# Altium PCB XL992FXT10W.PcbDoc (part 1 of 2)
Units mm, origin at the board's own origin, x right, y up, seen from the top; angles counter-clockwise.
Board outline 35.2 x 48.31 mm, 2 copper layers (Top Layer, Bottom Layer); 89 components, 57 nets, 280 pads, 137 vias.
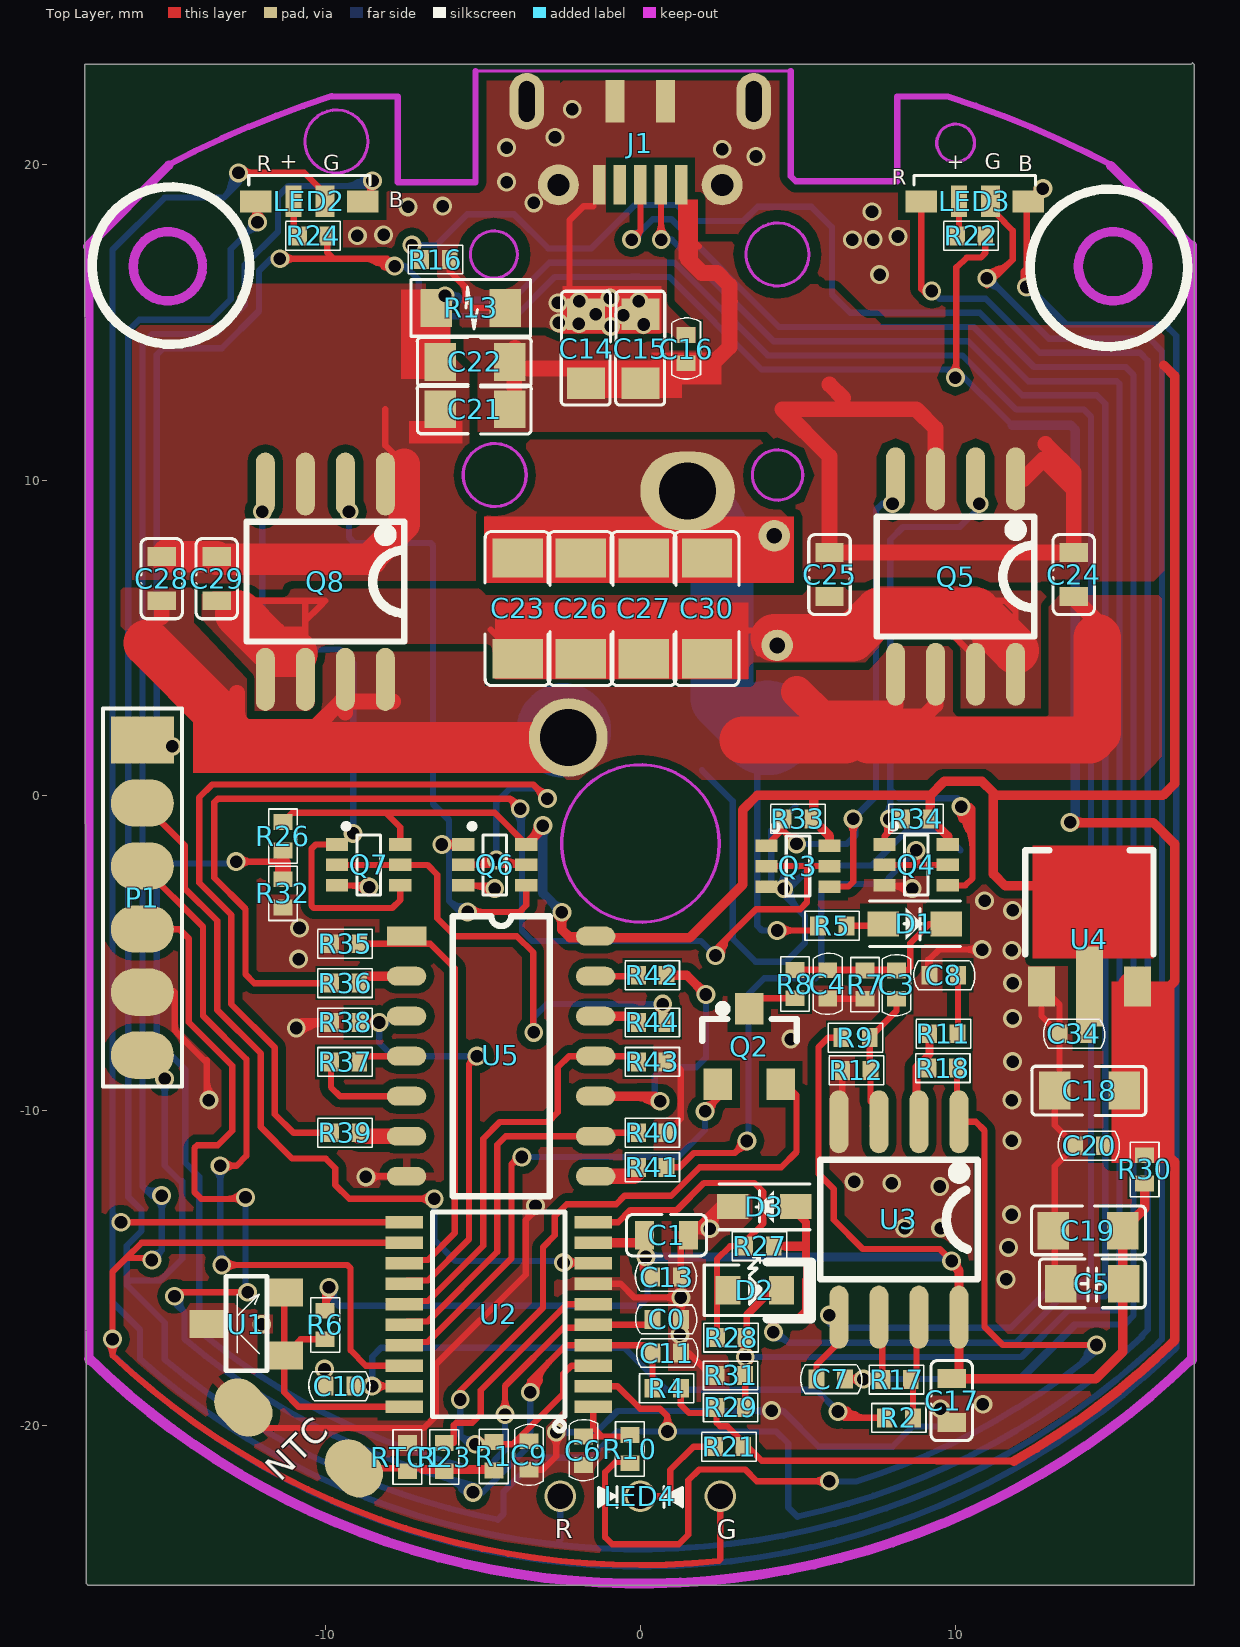
[diagram p0: Top Layer view]
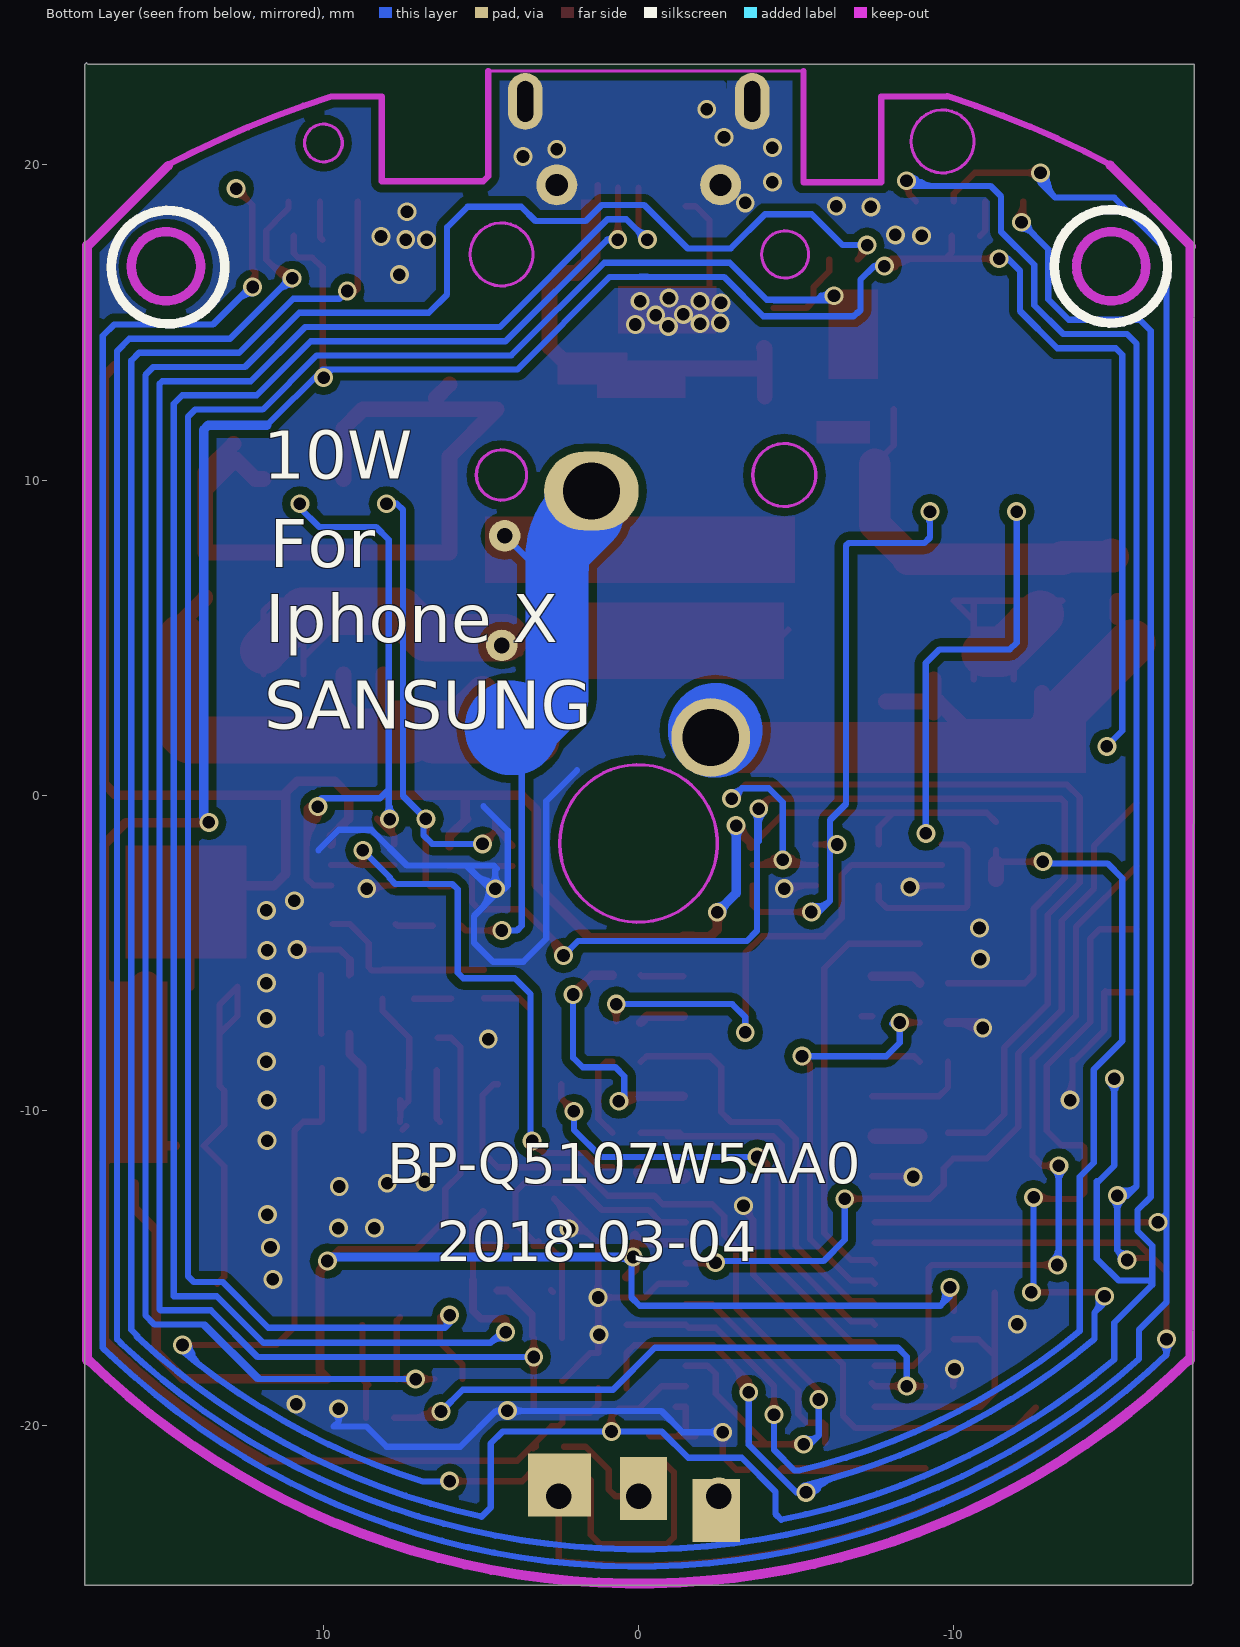
[diagram p1: Bottom Layer view, seen from below]

## Layer stack, top to bottom
Top Layer: signal copper 0.0356
Dielectric: core 0.32, FR-4, Dk 4.8
Bottom Layer: signal copper 0.0356

## Board outline
-17.577,-25.019 -17.526,-25.07 17.577,-25.07 17.577,23.19 17.526,23.241 17.475,23.19 -17.628,23.19

## Design rules (kind name [scope] priority, off if disabled: settings)
Clearance [All] p1: gap=0.25
Clearance Clearance_2 [All] p2: gap=0.254
Clearance Clearance_1 [All vs IsRegion] p3: gap=0.3
Clearance HOLE [HasPad('free-0') or  HasPad('free-1') or HasPad('free-2') or HasPad('free-3')] p4: gap=0.254
ComponentClearance [All] p1: gap=0 collisioncheckmode=3 verticalgap=0 showdistances=FALSE
FabricationTestPointUsage TestPointUsage [All] p1: valid=0 allowmultiple=FALSE
FabricationTestpoint Testpoint [(IsPad And (OnTopLayer Or OnBottomLayer))] p1: side=3 testpointundercomponent=TRUE minsize=1.016 maxsize=2.54 preferedsize=1.524 minholesize=0 maxholesize=1.016 preferedholesize=0.813 testpointgrid=0.025 allowsidetop=TRUE allowsidebottom=TRUE usegrid=TRUE gridtolerance=0
HoleToHoleClearance [All] p1 off: gap=0.254 allowstackedmicrovias=TRUE
MinimumSolderMaskSliver [All] p1 off: minsoldermaskwidth=0.254
PlaneClearance [All] p1: clearance=0.5
PlaneConnect [All] p1: planeconnectstyle=Direct reliefexpansion=0.508 reliefentries=4 reliefconductorwidth=0.254 reliefairgap=0.254
PolygonConnect Via [IsVia or InComponent(J1) or InComponent(C13) or InComponent(C20) or InComponent(C23) or InComponent(C24) or InComponent(C26) or InComponent(C14) or InComponent(R10) or InComponent(C34) or InComponent(C29) or InComponent(C30) or InComponent(C10) or InComponent(C11) or InComponent(C17) or InComponent(C7) or InComponent(P1) or InComponent(R57) or InComponent(U4) or InComponent(C36) or InComponent(C37)] p1: connectstyle=Direct reliefconductorwidth=0.254 reliefentries=4 polygonreliefangle="90 Angle"
PolygonConnect [All] p2: connectstyle=Relief reliefconductorwidth=0.254 reliefentries=4 polygonreliefangle="90 Angle"
RoutingVias [All] p1: holewidth=0.4 width=0.6 viastyle="Through Hole" minholewidth=0.25 minwidth=0.4 maxholewidth=9 maxwidth=10
SilkToSilkClearance [All] p1 off: silktosilkclearance=0.254
SilkscreenOverComponentPads [All] p1 off: minsilkscreentomaskgap=0.254
SolderMaskExpansion [All] p1: expansion=0.102
Width [All] p1: maxlimit=10 minlimit=0.2 preferedwidth=0.2
19 further rules are at their usual default settings.

## Classes and differential pairs
component class NB992F_POWER_V17: C14 C15 C16 C17 C18 C19 C20 C21 C22 C23 C24 C25 C26 C27 C28 C29 C30 C34 D2 J1 Q3 Q4 Q5 Q6 Q7 Q8 R26 R27 R28 R29 R30 R31 R32 R33 R34 R35 R36 R37 R38 R39 R40 R41 R42 R43 R44 U4 U5
component class NB992F_XL_N76E003_MAIN: C0 C1 C3 C4 C5 C6 C7 C8 C9 C10 C11 C13 D1 LED2 LED3 LED4 P1 Q2 R1 R2 R4 R5 R6 R7 R8 R9 R10 R11 R12 R13 R16 R17 R18 R21 R22 R23 R24 RTC1 U1 U2 U3

## Components (designator, comment, footprint, x,y, rotation, side; value= is the part's Value field where it differs from the comment)
C0 "103" C0402 0.838,-16.637 r180 top
C1 "106" C0603 0.831,-13.964 r180 top
C3 "103" C0402 8.131,-6.014 r270 top
C4 "333" C0402 5.949,-6.003 r90 top
C5 "226" C0805#1 14.344,-15.506 r0 top
C6 "103" C0402 -1.803,-20.803 r90 top
C7 "103" C0402 6.043,-18.53 r0 top
C8 "104" C0402 9.631,-5.714 r0 top
C9 "102" C0402 -3.531,-20.955 r90 top
C10 "103" C0402 -9.53,-18.754 r180 top
C11 "104" C0402 0.838,-17.704 r0 top
C13 "104" C0402 0.831,-15.291 r180 top
C14 "106/16V" C0805#2 -1.722,14.17 r90 top
C15 "106/16V" C0805#2 0.005,14.17 r90 top
C16 "104" C0402 1.452,14.158 r90 top
C17 "226" C0603 9.881,-19.214 r90 top
C18 "226" C0805#2 14.254,-9.375 r180 top
C19 "226" C0805#2 14.204,-13.821 r0 top
C20 "100P" C0402 14.254,-11.125 r180 top
C21 "106/16V" C0805#2 -5.25,12.25 r180 top
C22 "106/16V" C0805#2 -5.25,13.75 r180 top
C23 "104/50V" C1206 -3.884,5.928 r270 top
C24 "223" C0603 13.754,7 r90 top
C25 "223" C0603 6.004,7 r90 top
C26 "104/50V" C1206 -1.884,5.928 r270 top
C27 "473/50V" C1206 0.116,5.928 r270 top
C28 "223" C0603 -15.19,6.871 r270 top
C29 "223" C0603 -13.44,6.871 r270 top
C30 "104/50V" C1206 2.116,5.928 r270 top
C34 "104" C0402 13.754,-7.571 r0 top
D1 "4148" SOD323 8.717,-4.087 r0 top
D2 "Red" LED0603 3.631,-15.714 r0 top
D3 "4148" SOD323 3.937,-13.056 r180 top
J1 "USB Micar" "USB CRO5" 0,20.691 r0 top locked
LED2 "RGB" LED-RGB02 -10.502,18.843 r0 top
LED3 "RGB" LED-RGB02 10.615,18.843 r0 top
LED4 "" LED2 0,-22.25 r0 top
P1 "" SPIN6 -15.8,1.75 r270 top
Q2 "2N7002" SOT-23B 3.462,-7.976 r0 top
Q3 "BC847" SOT-363 5.004,-2.25 r0 top
Q4 "BC847" SOT-363 8.756,-2.214 r0 top
Q5 "4953" SOP8D 10.004,6.937 r180 top
Q6 "BC847" SOT-363 -4.619,-2.214 r0 top
Q7 "BC847" SOT-363 -8.619,-2.214 r0 top
Q8 "9926" SOP8D -9.996,6.774 r180 top
R1 "10K" R0402 -4.648,-20.98 r270 top (schematic designator R23)
R2 "1K" R0402 8.204,-19.761 r0 top
R4 "10K" R0402 0.838,-18.821 r180 top
R5 "1K" R0402 6.09,-4.147 r180 top
R6 "2.2K" R0402 -10.001,-16.812 r270 top
R7 "33K" R0402 7.131,-6.014 r90 top
R8 "68K" R0402 4.908,-5.994 r270 top
R9 "100K" R0402 6.829,-7.696 r0 top
R10 "1K" R0402 -0.33,-20.752 r270 top
R11 "33K" R0402 9.618,-7.571 r180 top
R12 "68K" R0402 6.858,-8.732 r180 top
R13 "0.033R" R0805 -5.382,15.462 r180 top
R16 "1K" R0402 -6.5,17 r0 top
R17 "33K" R0402 8.132,-18.545 r0 top
R18 "1M" R0402 9.599,-8.661 r180 top
R21 "220" R0402 2.819,-20.676 r180 top
R22 "220" R0402 10.5,17.75 r180 top
R23 "1K" R0402 -6.223,-21.006 r90 top
R24 "220" R0402 -10.384,17.75 r180 top
R26 "10K" R0402 -11.34,-1.302 r90 top
R27 "4.7K" R0402 3.783,-14.309 r0 top
R28 "4.7K" R0402 2.881,-17.214 r180 top
R29 "10K" R0402 2.87,-19.431 r180 top
R30 "10R" R0402 16.004,-11.875 r90 top
R31 "2.2K" R0402 2.87,-18.415 r0 top
R32 "10K" R0402 -11.34,-3.114 r90 top
R33 "100K" R0402 5.004,-0.75 r180 top
R34 "100K" R0402 8.754,-0.75 r0 top
R35 "100K" R0402 -9.369,-4.714 r180 top
R36 "1K" R0402 -9.369,-5.964 r180 top
R37 "1K" R0402 -9.369,-8.464 r180 top
R38 "100K" R0402 -9.369,-7.214 r180 top
R39 "1K" R0402 -9.369,-10.714 r180 top
R40 "100K" R0402 0.381,-10.714 r0 top
R41 "1K" R0402 0.381,-11.811 r0 top
R42 "1K" R0402 0.381,-5.714 r180 top
R43 "100K" R0402 0.381,-8.464 r0 top
R44 "1K" R0402 0.381,-7.214 r0 top
RTC1 "103J" R0402 -7.391,-21.006 r270 top
U1 "TL431" SOT-23A -12.5,-16.782 r90 top
U2 "N76E003" TSSOP20 -4.493,-16.479 r180 top locked
U3 "LM358" SOP8 8.209,-13.465 r180 top
U4 "7150" SOT-89-5V 14.254,-6.071 r0 top
U5 "3421" SOP14 -4.369,-8.214 r270 top locked

## Footprints (in the part's own frame and the unit in brackets; to place one, negate y for a bottom-side part, rotate by r counter-clockwise, add the part's x,y. Pads: shape width x height; smd on the part's side, far side on the other; paste and mask are expansions set on the pad)
C0402 [mm]
  rect 0.5x0.6 smd: 1(-0.45,0) 2(0.45,0)
  silkscreen extent -0.95,-0.46 0.99,0.46
C0603 [mm]
  rect 0.6x0.9 smd: 1(-0.7,0) 2(0.7,0)
  silkscreen extent -1.27,-0.66 1.27,0.66, body extent -0.8,-0.4 0.8,0.4, height 0.4
C0805#1 [mm]
  rect 1x1.2 smd: 1(-1,0) 2(1,0)
  silkscreen extent -1.68,-0.76 1.68,0.79, body extent -1,-0.63 1,0.62, height 0.3
C0805#2 [mm]
  rect 1x1.2 smd: 1(-1.1,0) 2(1.1,0)
  silkscreen extent -1.79,-0.77 1.83,0.79, body extent -1,-0.63 1,0.62, height 0.3
C1206 [mm]
  rect 1.25x1.6 smd: 1(-1.6,0) 2(1.6,0)
  silkscreen extent -2.44,-1.04 2.45,1.02, body extent -1.6,-0.8 1.6,0.8, height 0.55
LED2 [mm]
  round 1 / inner round 0.8 / far side round 1.2 hole 0.8: 1(-2.54,0) 2(0,0) 3(2.54,0)
  silkscreen extent -1.33,-0.35 1.34,0.31
LED0603 [mm]
  rect 0.8x0.9 smd: 1(-0.85,0) 2(0.85,0)
  silkscreen extent -1.6,-0.9 1.8,1.05, body extent -0.77,-0.43 0.78,0.42, height 0.45
LED-RGB02 [mm]
  rect 0.5x1 smd: 1(-0.5,0)
  rect 1x0.7 smd: 2(1.7,0) 4(-1.7,0)
  rect 0.6x1 smd: 3(0.5,0)
  silkscreen extent -1.92,0.53 1.92,0.83
R0402 [mm]
  rect 0.5x0.6 smd: 1(-0.45,0) 2(0.45,0)
  silkscreen extent -0.86,-0.46 0.86,0.46
R0805 [mm]
  rect 1x1.2 smd: 1(-1.1,0) 2(1.1,0)
  silkscreen extent -1.9,-0.9 1.9,0.9, body extent -1,-0.62 1,0.63, height 0.45
SOD323 [mm] "0805"
  rect 1x0.8 smd: 1(-1,0) 2(1,0)
  silkscreen extent -1.44,-0.72 1.44,0.73, body extent -1.22,-0.65 1.28,0.65, height 0.81
SOP8 [mm]
  oval 0.6x2 smd: 1(-1.905,-3.1) 2(-0.635,-3.1) 3(0.635,-3.1) 4(1.905,-3.1) 5(1.905,3.1) 6(0.635,3.1) 7(-0.635,3.1) 8(-1.905,3.1)
  silkscreen extent -2.5,-1.9 2.5,1.9
SOP8D [mm]
  oval 0.6x2 smd: B1(-0.635,-3.1) B2(1.905,-3.1) C1(-1.905,3.1) C1(-0.635,3.1) C2(0.635,3.1) C2(1.905,3.1) E1(-1.905,-3.1) E2(0.635,-3.1)
  silkscreen extent -2.5,-1.9 2.5,1.9
SOP14 [mm]
  rect 0.6x1.25 smd: 1(-3.741,-3.047)
  oval 0.6x1.25 smd: 2(-2.471,-3.047) 3(-1.201,-3.047) 4(0.069,-3.047) 5(1.339,-3.047) 6(2.609,-3.047) 7(3.879,-3.047) 8(3.879,2.953) 9(2.609,2.953) 10(1.339,2.953) 11(0.069,2.953) 12(-1.201,2.953) 13(-2.471,2.953) 14(-3.741,2.953)
  round 0.5 on Top Overlay: ""(-3.789,-4.098) ""(1.336,3.971) ""(1.372,-4.053)
  round 1 on Top Overlay: ""(-3.708,-0.864)
  silkscreen extent -4.38,-1.59 4.51,1.49
SOT-23A [mm]
  rect 0.9x1.2 smd: 1(0,1.2) 2(1,-1.2) 3(-1,-1.2)
  silkscreen extent -1.48,-0.65 1.52,0.65
SOT-23B [mm]
  rect 0.9x1 smd: B(-1,-1.2) C(0,1.2) E(1,-1.2)
  silkscreen extent -1.5,0.17 1.5,1.32, body extent -1.5,-1.4 1.5,1.4, height 1.3
SOT-89-5V [mil]
  rect 34x100 smd: Vin(0,0)
  rect 34x50 smd: Vout(60,0) Vss(-60,0)
  oval 59.06x98.43 on Top Solder: ""(0,118)
  oval 59.06x98.43 on Top Paste: ""(0,118)
  silkscreen extent -80,40 80,170
SOT-363 [mm]
  rect 0.7x0.4 smd: 1(-1,0.65) 2(-1,0) 3(-1,-0.65) 4(1,-0.65) 5(1,0) 6(1,0.65)
  silkscreen extent -0.74,-0.95 0.38,1.24
SPIN6 [mm]
  rect 1.5x2 smd: 1(0,0)
  oval 1.5x2 smd: 2(2,0) 3(4,0) 4(6,0) 5(8,0) 6(10,0)
  silkscreen extent -1,-1.25 11,1.25
TSSOP20 [mm]
  rect 1.2x0.4 smd: 1(-3,2.925) 2(-3,2.275) 3(-3,1.625) 4(-3,0.975) 5(-3,0.325) 6(-3,-0.325) 7(-3,-0.975) 8(-3,-1.625) 9(-3,-2.275) 10(-3,-2.925) 11(3,-2.925) 12(3,-2.275) 13(3,-1.625) 14(3,-0.975) 15(3,-0.325) 16(3,0.325) 17(3,0.975) 18(3,1.625) 19(3,2.275) 20(3,2.925)
  silkscreen extent -2.1,-3.25 2.1,3.71
"USB CRO5" [mm]
  rect 0.4x1.25 smd mask+0: 1(1.3,-1.325) 2(0.65,-1.325) 3(0,-1.325) 4(-0.65,-1.325) 5(-1.3,-1.325)
  oval 1.1x1.8 hole 0.5 slot 1.3 at 90 deg mask+0: 6(-3.6,1.325) 6(3.6,1.325)
  round 1.3 hole 0.7 mask+0: 6(-2.6,-1.325) 6(2.6,-1.325)
  rect 0.6x1.35 smd mask+0: 6(-0.8,1.325) 6(0.8,1.325)
  body extent -3.99,-1.49 3.99,3.94, height 2.71

## Part data
C0 C1 C6 C7 C9 C10 C11 C13 C16 C20 C24 C25 C28 C29 C34: library part Cap, "Capacitor"
C3 C4 C5 C8 C14 C15 C17 C18 C19 C21 C22 C23 C26 C27 C30: library part CH
D1 D3: library part D0, "1N4001"
D2: library part LED02
J1: library part USB
LED2 LED3: library part LED05
LED4: library part LED2A
P1: library part "Header 6", "Header, 6-Pin"
Q2: library part MOSFETN
Q3 Q4 Q6 Q7: library part D_PNP
Q5: library part MOSFETP2
Q8: library part MOSFETN2
R1 R6 R7 R8 R9 R11 R12 R13 R17 R18 R21 R26 R27 R28 R29 R30 R31 R32 R33 R34 R35 R38 R40 R43: library part R, "1K"
R2 R4 R5 R10 R16 R23 R36 R37 R39 R41 R42 R44: library part R
R22 R24: library part Res01
RTC1: library part RTC
U1: library part "IC TL431", "IC"
U2: library part 103F
U3: library part 4558
U4: library part VOLTREG
U5: library part CD4069

## Free pads (board coordinates)
  rect 1.5x2 smd far side: 0(-2.464,-22.708) 0(-0.152,-21.996)
  oval 3x2.5 hole 1.8: 0(1.499,9.652)
  rect 2x2 smd far side: 0(2.515,-21.895)
  round 1 hole 0.5: 0(4.254,8.23) 0(4.343,4.753)
  oval 1.5x2 smd rot 45: 1(-12.598,-19.431) 1(-9.093,-21.361)
  round 2.5 hole 1.8: 1(-2.286,1.829)
  round 1.5 on Top Solder: 2(12.019,-7.948) 4(2.189,17.528)

## Via types
v1: diameter 0.6, hole 0.4, Top Layer to Bottom Layer, 137 vias

## Nets (pads, with @x,y where several pads share a name; then routed paths per layer and width w, separated by ;. In a path a pad name is that pad's centre, name@x,y a point inside that pad or via, vN(x,y) a via of type N, cw(c..) or ccw(c..) an arc to the next point about the centre after c; other vN are vias at no path point)
5V: C18.1 C20.1 P1.1 R4.1 R21.1 R22.1 R24.1 R29.2 R30.2 U4.Vout | length 120.1
  Top Layer w0.2: v1(-11.436,17.025) -11.468,17.057 -11.468,17.094 -11.399,17.025 -9.735,17.025 ; R24.1@-9.934,17.75 -9.934,17.224 -9.735,17.025 ; -8.419,16.925 ccw(c-8.187,17.326) v1@-7.915,16.951 ; -8.152,16.771 ccw(c-7.989,17.053) v1(-7.798,16.789) ; v1@-7.996,16.759 ccw(c-8.324,16.71) -8.158,16.997 ccw(c-7.992,17.285) v1@-7.871,16.976 ; R4.1@1.288,-18.821 1.288,-19.341 1.556,-19.609 2.42,-19.609 2.42,-19.914 2.532,-20.026 2.764,-20.026 R21.1@3.269,-20.531 ; R21.1@3.346,-20.726 3.346,-20.676 R21.1@3.269,-20.676 R21.1@3.269,-20.531 ; 9.398,-21.133 11.659,-21.133 ; v1@9.859,13.391 ccw(c9.443,13.807) 10.031,13.807 ; v1@10.031,13.506 10.031,16.75 10.047,16.75 10.358,17.061 10.804,17.061 10.95,17.207 R22.1@10.95,17.75 ; 10.031,13.658 ccw(c10.408,13.658) v1@10.141,13.391 ; 11.873,-21.122 11.862,-21.133 11.853,-21.133 ; -10.953,17.025 ccw(c-10.953,16.542) -11.295,16.883 cw(c-10.953,16.542) -10.953,17.025 ; -10.953,17.025 cw(c-10.953,17.507) -11.295,17.166 ccw(c-10.953,17.507) -10.953,17.025 ; -9.735,17.025 -8.033,17.025 ; -8.033,17.025 ccw(c-7.908,17.149) -7.856,16.981 cw(c-7.908,17.149) -8.033,17.025 ; -8.033,17.025 cw(c-8.158,16.9) -7.989,16.848 ccw(c-8.158,16.9) -8.033,17.025 ; -8.033,17.025 v1(-7.798,16.789) ; v1(-7.798,16.789) ccw(c-8.366,16.222) -8.366,17.025 cw(c-8.366,16.222) v1(-7.798,16.789) ; R21.1@3.269,-20.531 3.857,-21.118 11.644,-21.118 ; 11.644,-21.118 11.659,-21.133 ; 11.644,-21.118 11.838,-21.118 11.853,-21.133 ; 11.659,-21.133 11.853,-21.133 ; -8.848,17.025 cw(c-8.848,15.739) -7.939,16.648 ccw(c-8.848,15.739) -8.848,17.025
  Top Layer w0.3: 11.853,-21.133 ccw(c0.004,-0.032) 11.873,-21.122 ccw(c0.004,-0.032) 16.954,-17.304 16.954,-11.636 16.743,-11.425 R30.2@16.004,-11.425 15.704,-11.125 15.004,-11.125 ; v1@13.64,-0.87 16.279,-0.87 16.954,-1.545 16.954,-5.908 16.791,-6.071 U4.Vout@15.778,-6.071 ; C20.1@14.704,-11.125 15.004,-11.125 ; C18.1@15.354,-9.375 15.354,-10.775 15.004,-11.125 ; v1@13.746,-0.97 cw(c13.986,-1.21) 13.986,-0.87 ccw(c13.986,-1.21) v1@13.746,-0.97 ; v1@13.746,-0.758 ccw(c14.018,-0.486) 14.018,-0.87 cw(c14.018,-0.486) v1@13.746,-0.758 ; C18.1@15.354,-9 15.778,-8.576 15.778,-8.336 15.354,-8.76 C18.1@15.354,-9
  Top Layer w1: 15.644,-8.338 U4.Vout@15.644,-6.073
  Bottom Layer w0.2: v1(-14.859,1.549) -15.35,2.04 -15.35,13.976 -15.138,14.188 -13.278,14.188 -12.1,15.365 -12.1,16.643 -11.719,17.025 v1(-11.436,17.025) ; v1(-7.798,16.789) -7.468,16.789 ; v1@-7.621,16.697 cw(c-7.468,16.617) -7.468,16.789 ; v1@-7.621,16.882 ccw(c-7.468,16.962) -7.468,16.789 ; v1(10,13.25) 9.744,13.506 ; 11.799,11.738 10.031,13.506 9.744,13.506 ; -7.468,16.789 -7.036,16.358 -7.036,15.382 -6.96,15.306 -6.95,15.316 -6.934,15.316 -6.818,15.2 -3.955,15.2 -2.708,16.447 -0.281,16.447 -0.277,16.451 -0.042,16.451 -0.046,16.447 0.914,16.447 3.855,13.506 9.744,13.506
  Bottom Layer w0.3: 11.799,11.738 13.665,11.738 13.804,11.598 13.804,-0.699 v1(13.64,-0.864)
A_PWM: R35.1 U2.13 U5.1 | length 13.8
  Top Layer w0.2: R35.1@-8.919,-4.714 -6.663,-4.714 -5.888,-5.489 -5.888,-13.894 -6.748,-14.754 -7.393,-14.754 U2.13@-7.493,-14.854
"AMP AD": R2.2 R17.2 U3.7 | length 3.1
  Top Layer w0.2: R17.2@8.581,-18.714 R17.2@8.654,-18.641 ; R2.2@8.654,-19.761 R17.2@8.654,-18.641 ; U3.7@8.781,-16.829 8.766,-16.814 8.766,-18.529 R17.2@8.654,-18.641
B: LED2.2 LED3.2 LED4.3 pad.0@2.515,-21.895 U2.12 | length 175.1
  Top Layer w0.2: v1(-15.5,-14.75) -15.688,-14.75 -15.75,-14.688 -16.311,-14.688 ; LED2.2@-8.802,18.843 -8.577,19.068 -8.577,19.668 -8.5,19.591 v1(-8.5,19.5) ; U2.12@-7.493,-14.204 -15.827,-14.204 -16.311,-14.688 ; 2.494,-24.305 cw(c0.004,-0.032) -16.75,-17.77 v1(-16.75,-17.261) -16.75,-15.127 -16.311,-14.688 ; 2.54,-24.25 LED4.3@2.54,-22.25 ; v1(12.25,16.127) 12.233,16.127 12.172,16.066 12.172,16.62 ; LED3.2@12.507,18.998 cw(c12.844,18.908) v1(12.774,19.25) ; LED3.2@12.522,18.982 ccw(c12.432,19.32) v1(12.774,19.25) ; -16.75,-17.744 ccw(c-17.233,-17.744) -16.891,-17.403 cw(c-17.233,-17.744) -16.75,-17.744 ; -16.75,-17.744 cw(c-16.267,-17.744) -16.609,-17.403 ccw(c-16.267,-17.744) -16.75,-17.744 ; 12.172,16.62 ccw(c12.548,16.62) 12.353,16.298 cw(c12.548,16.62) 12.172,16.62 ; 12.172,16.62 12.265,16.713 12.265,18.741 v1(12.774,19.25) ; LED3.2@12.433,18.909 ccw(c12.091,19.25) 12.574,19.25 cw(c12.091,19.25) LED3.2@12.433,18.909 ; LED3.2@12.433,18.909 cw(c12.774,18.567) 12.774,19.05 ccw(c12.774,18.567) LED3.2@12.433,18.909 ; v1@-8.641,19.359 cw(c-8.797,19.203) -8.577,19.203 ccw(c-8.797,19.203) v1@-8.641,19.359 ; LED2.2@-8.577,19.061 cw(c-8.291,19.061) -8.414,19.319 ccw(c-8.291,19.061) LED2.2@-8.577,19.061 ; v1@12.109,16.268 ccw(c11.955,16.422) 12.172,16.422 cw(c11.955,16.422) v1@12.109,16.268
  Bottom Layer w0.2: v1(-16.75,-17.261) -16.75,-17.764 -16.724,-17.789 ; -16.746,-17.759 ccw(c0.012,-0.221) 16.606,-17.914 17.004,-17.54 17.004,14.58 16.646,14.938 13.51,14.938 12.321,16.127 v1(12.25,16.127) ccw(c12.654,16.259) 12.544,15.848 ; v1(-15.5,-14.75) -15.19,-14.44 ; -15.488,-12.548 cw(c-15.456,-12.845) v1(-15.19,-12.71) ; -9.014,19.426 cw(c-8.868,19.173) v1@-8.649,19.367 ; -8.802,19.549 cw(c-8.681,19.339) v1(-8.5,19.5) ; -16.75,-17.744 ccw(c-17.233,-17.744) -16.891,-17.403 cw(c-17.233,-17.744) -16.75,-17.744 ; -16.75,-17.744 cw(c-16.267,-17.744) -16.609,-17.403 ccw(c-16.267,-17.744) -16.75,-17.744 ; -15.8,-12.41 ccw(c-15.444,-12.054) -15.262,-12.523 cw(c-15.444,-12.054) -15.8,-12.41 ; -15.8,-12.41 -15.8,14.332 -15.494,14.638 -13.464,14.638 -12.55,15.552 -12.55,16.83 -11.497,17.883 -11.497,18.451 -11.5,18.454 -11.5,19 -11.165,19.335 -8.665,19.335 v1(-8.5,19.5) ; -15.8,-12.41 -15.5,-12.71 ; -15.5,-12.71 ccw(c-15.5,-12.569) -15.372,-12.627 cw(c-15.5,-12.569) -15.5,-12.71 ; -15.5,-12.71 cw(c-15.5,-12.851) -15.372,-12.792 ccw(c-15.5,-12.851) -15.5,-12.71 ; -15.5,-12.71 v1(-15.19,-12.71) ; -15.19,-14.44 ccw(c-14.92,-14.709) -15.3,-14.736 cw(c-14.92,-14.709) -15.19,-14.44 ; -15.19,-14.44 cw(c-15.459,-14.17) -15.486,-14.55 ccw(c-15.459,-14.17) -15.19,-14.44 ; -15.19,-14.44 v1(-15.19,-12.71) ; -15.19,-13.193 ccw(c-15.672,-13.193) -15.331,-12.851 cw(c-15.672,-13.193) -15.19,-13.193 ; -15.19,-13.193 cw(c-14.707,-13.193) -15.048,-12.851 ccw(c-14.707,-13.193) -15.19,-13.193 ; v1(-15.19,-12.71) cw(c-15.323,-12.367) -15.583,-12.627 ccw(c-15.323,-12.367) v1(-15.19,-12.71) ; v1(-8.5,19.5) cw(c-8.899,19.899) -8.899,19.335 ccw(c-8.899,19.899) v1(-8.5,19.5) ; -9.382,19.335 ccw(c-9.382,20.382) -8.641,19.641 cw(c-9.382,20.382) -9.382,19.335 ; v1@12.25,15.927 cw(c12.25,15.273) 12.713,15.735 ccw(c12.25,15.273) v1@12.25,15.927 ; v1@12.45,16.127 ccw(c12.762,16.127) 12.541,15.907 cw(c12.762,16.127) v1@12.45,16.127
B_PWM: R40.1 U2.16 U5.9 | length 12.4
  Top Layer w0.2: U2.16@-7.493,-16.804 -7.393,-16.704 -6.748,-16.704 -4.538,-14.494 -4.538,-11.091 -4.269,-10.822 U5.9@-1.416,-10.822 ; U5.9@-0.916,-10.822 U5.9@-1.416,-10.822 ; R40.1@-0.069,-10.714 -1.307,-10.714 U5.9@-1.416,-10.822
CLK: P1.3 U2.18 | length 29.4
  Top Layer w0.2: P1.3@-15.8,-2.25 -13.878,-4.172 -13.878,-7.002 -12.499,-8.381 -12.499,-11.447 -12.812,-11.76 v1(-13.335,-11.76) ; v1(-13.284,-14.91) -9.299,-14.91 -9.195,-15.014 -9.195,-17.62 -8.711,-18.104 U2.18@-7.493,-18.104 ; -12.852,-11.76 ccw(c-12.852,-12.243) -13.194,-11.902 cw(c-12.852,-12.243) -12.852,-11.76 ; -12.852,-11.76 cw(c-12.852,-11.277) -13.194,-11.619 ccw(c-12.852,-11.277) -12.852,-11.76 ; -12.801,-14.91 ccw(c-12.801,-15.393) -13.143,-15.051 cw(c-12.801,-15.393) -12.801,-14.91 ; -12.801,-14.91 cw(c-12.801,-14.427) -13.143,-14.768 ccw(c-12.801,-14.427) -12.801,-14.91
  Bottom Layer w0.2: v1(-13.335,-11.76) -13.335,-14.859 v1(-13.284,-14.91) ; -13.335,-12.243 ccw(c-13.818,-12.243) -13.476,-11.902 cw(c-13.818,-12.243) -13.335,-12.243 ; -13.335,-12.243 cw(c-12.852,-12.243) -13.194,-11.902 ccw(c-12.852,-12.243) -13.335,-12.243 ; v1@-13.426,-14.768 ccw(c-13.644,-14.55) -13.335,-14.55 cw(c-13.644,-14.55) v1@-13.426,-14.768 ; -13.335,-14.304 ccw(c-12.679,-14.304) -13.143,-14.768 cw(c-12.679,-14.304) -13.335,-14.304
CODE2_DET: C9.2 Q2.E R1.1 U2.3 | length 27.4
  Top Layer w0.2: v1(-5.715,-19.177) -5.715,-18.898 -3.088,-16.271 -3.088,-14.346 -2.712,-13.969 -2.712,-13.36 -2.331,-12.979 -0.766,-12.979 -0.5,-12.714 0.977,-12.714 1.886,-11.805 4.477,-11.805 4.957,-11.324 4.957,-9.525 4.608,-9.176 Q2.E@4.462,-9.176 ; v1@-4.953,-20.599 -4.048,-20.599 ; C9.2@-3.477,-20.507 -3.569,-20.599 -4.048,-20.599 ; U2.3@-1.493,-18.104 -2.184,-18.104 -2.443,-18.362 -2.443,-18.995 -4.048,-20.599 ; R1.1@-4.75,-20.599 ccw(c-4.75,-21.082) -5.091,-20.741 cw(c-4.75,-21.082) R1.1@-4.75,-20.599 ; R1.1@-4.75,-20.599 cw(c-4.75,-20.117) -5.091,-20.458 ccw(c-4.75,-20.117) R1.1@-4.75,-20.599
  Bottom Layer w0.2: v1(-5.715,-19.177) -5.715,-20.32 ; v1@-5.436,-20.599 -5.715,-20.32 ; -5.715,-20.32 ccw(c-5.436,-20.041) -5.301,-20.412 cw(c-5.436,-20.041) -5.715,-20.32
  other v1: -5.232,-20.599
CODE_DET: R10.2 R18.1 U3.1 | length 39.1
  Top Layer w0.2: R10.2@-0.33,-21.151 -0.78,-21.151 -1.118,-21.488 -1.118,-23.546 -0.889,-23.774 1.219,-23.774 1.524,-23.47 1.524,-21.742 1.866,-21.4 3.329,-21.4 3.696,-21.768 v1(6,-21.768) ; R18.1@10.049,-8.661 10.049,-10.301 U3.1@10.114,-10.365 10.644,-10.365 10.922,-10.643 10.922,-16.866 11.506,-17.45 v1@14.326,-17.45 ; 5.517,-21.768 ccw(c5.517,-21.285) 5.859,-21.626 cw(c5.517,-21.285) 5.517,-21.768 ; 5.517,-21.768 cw(c5.517,-22.251) 5.859,-21.909 ccw(c5.517,-22.251) 5.517,-21.768
  Bottom Layer w0.2: v1(6,-21.768) 6.012,-21.78 6.851,-21.78 ccw(c0.004,-0.032) v1@14.607,-17.542 ; 14.158,-17.737 cw(c14.603,-17.911) v1(14.478,-17.45) ; v1@14.326,-17.577 v1@14.326,-17.45 ; v1(14.478,-17.45) cw(c13.96,-17.392) 14.286,-17.799 ccw(c13.96,-17.392) v1(14.478,-17.45) ; 13.909,-18.101 ccw(c13.281,-17.317) 14.279,-17.428 cw(c13.281,-17.317) 13.909,-18.101
COM: LED2.4 LED3.4 P1.6 U2.2 | length 138
  Top Layer w0.2: LED2.4@-12.202,18.843 -12.202,18.236 v1(-12.147,18.182) ; U2.2@-1.493,-18.754 -0.724,-18.754 -0.007,-19.471 0.625,-19.471 0.864,-19.71 ; v1(0.864,-20.193) 0.864,-19.71 ; LED3.4@8.915,18.843 8.915,16.066 9.131,15.85 9.25,15.968 v1(9.25,16) ; 0.864,-19.71 ccw(c1.346,-19.71) 1.005,-20.052 cw(c1.346,-19.71) 0.864,-19.71 ; 0.864,-19.71 cw(c0.381,-19.71) 0.722,-20.052 ccw(c0.381,-19.71) 0.864,-19.71 ; v1@-12.289,18.323 ccw(c-12.498,18.533) -12.202,18.533 cw(c-12.498,18.533) v1@-12.289,18.323 ; LED2.4@-12.202,18.796 ccw(c-11.533,18.796) -12.006,18.323 cw(c-11.533,18.796) LED2.4@-12.202,18.796
  Bottom Layer w0.2: v1(-15.095,-9) -15.095,-11.755 -14.6,-12.25 -14.54,-12.25 -14.54,-14.709 -15.231,-15.4 -16.2,-15.4 -16.3,-15.5 ; v1(-12.147,18.182) -13,17.329 -13,15.738 -13.651,15.088 -15.9,15.088 -16.25,14.738 -16.25,-12.75 -15.827,-13.173 -15.827,-13.827 -16.3,-14.3 -16.3,-15.5 ; v1@0.95,-20.279 v1(0.864,-20.193) ; v1(9.25,16) 9.494,15.756 10.963,15.756 12.681,14.038 15.859,14.038 16.104,13.792 16.104,-16.965 15.931,-17.138 ; 15.912,-17.157 15.931,-17.138 ; -16.3,-15.5 -16.3,-15.541 -15.095,-16.746 -15.095,-17.908 ccw(c0.004,-0.032) -4.522,-22.99 -4.342,-22.81 -4.342,-22.099 -3.274,-21.031 -1.575,-21.031 -0.737,-20.193 v1(0.864,-20.193) ; -15.095,-9.483 ccw(c-15.578,-9.483) -15.236,-9.141 cw(c-15.578,-9.483) -15.095,-9.483 ; -15.095,-9.483 cw(c-14.612,-9.483) -14.954,-9.141 ccw(c-14.612,-9.483) -15.095,-9.483 ; -12.489,17.84 ccw(c-12.83,18.182) -12.347,18.182 cw(c-12.83,18.182) -12.489,17.84 ; -12.489,17.84 cw(c-12.147,17.499) -12.147,17.982 ccw(c-12.147,17.499) -12.489,17.84 ; v1(0.864,-20.193) 4.32,-20.193 4.699,-20.572 4.699,-22.606 4.988,-22.895 ccw(c0.004,-0.032) 15.931,-17.176 15.931,-17.138
D+: D2.2 J1.3 R28.1 R29.1 R31.2 | length 70.8
  Top Layer w0.2: v1(-0.275,17.63) 0.004,17.909 ; J1.3@0.004,19.288 0.004,17.909 ; R29.1@3.331,-19.431 R28.1@3.331,-17.214 3.381,-17.164 3.381,-16.464 ; 0.004,17.909 ccw(c0.21,17.704) -0.077,17.66 cw(c0.21,17.704) 0.004,17.909 ; 0.004,17.909 cw(c-0.201,18.115) -0.245,17.828 ccw(c-0.201,18.115) 0.004,17.909 ; v1@3.19,-17.97 cw(c2.85,-18.31) 3.331,-18.31 ccw(c2.85,-18.31) v1@3.19,-17.97 ; v1@3.19,-17.687 ccw(c2.85,-17.347) 3.331,-17.347 cw(c2.85,-17.347) v1@3.19,-17.687 ; R31.2@3.331,-18.312 cw(c3.816,-18.312) 3.473,-17.97 ccw(c3.816,-18.312) R31.2@3.331,-18.312 ; R28.1@3.331,-17.345 ccw(c3.816,-17.345) 3.473,-17.687 cw(c3.816,-17.345) R28.1@3.331,-17.345
  Top Layer w0.25: 3.397,-16.479 4.162,-15.714 D2.2@4.481,-15.714
  Bottom Layer w0.2: v1(-0.275,17.63) -0.254,17.63 0.396,18.28 0.99,18.28 4.414,14.856 10.59,14.856 12.309,13.138 15.122,13.138 15.204,13.056 15.204,-16.324 15.178,-16.35 13.575,-16.35 12.097,-17.828 v1(3.332,-17.828) ; v1@-0.275,17.83 ccw(c-0.275,18.362) 0.101,17.986 ; v1@-0.075,17.63 cw(c0.358,17.63) 0.052,17.936
D-: D3.1 J1.2 R27.2 | length 67.3
  Top Layer w0.2: v1@0.589,17.706 0.654,17.772 J1.2@0.654,19.288 ; 5.256,-15.382 5.256,-14.703 ; v1@0.523,17.771 ccw(c0.207,18.088) 0.654,18.088 cw(c0.207,18.088) v1@0.523,17.771 ; 0.654,18.138 ccw(c1.173,18.138) 0.806,17.771 cw(c1.173,18.138) 0.654,18.138
  Top Layer w0.25: v1(4.221,-17.041) 4.221,-16.66 ; R27.2@4.233,-14.309 4.614,-14.309 ; D3.1@4.937,-13.233 5.256,-13.553 5.256,-14.703 ; 5.256,-15.382 5.256,-16.361 5.004,-16.614 4.267,-16.614 4.221,-16.66 ; 4.221,-16.66 ccw(c4.547,-16.66) 4.335,-16.908 cw(c4.547,-16.66) 4.221,-16.66 ; 4.221,-16.66 cw(c3.894,-16.66) 4.107,-16.908 ccw(c3.894,-16.66) 4.221,-16.66
  Top Layer w0.3: 4.614,-14.309 5.207,-14.309
  Bottom Layer w0.2: v1(0.665,17.63) 1.004,17.63 ; v1@0.84,17.533 cw(c1.004,17.443) 1.004,17.63 ; v1@0.84,17.727 ccw(c1.004,17.817) 1.004,17.63 ; v1(4.221,-17.041) 4.366,-17.041 4.703,-17.378 ; 1.004,17.63 4.228,14.406 10.404,14.406 12.122,12.688 14.487,12.688 14.754,12.421 14.754,-15.9 13.389,-15.9 11.91,-17.378 4.703,-17.378 ; 4.703,-17.378 ccw(c4.345,-17.737) 4.256,-17.238 cw(c4.345,-17.737) 4.703,-17.378
DATA: P1.2 U2.8 | length 27.6
  Top Layer w0.2: P1.2@-15.8,-0.25 -14.45,-1.6 -14.45,-2.964 -13.428,-3.986 -13.428,-6.816 -12.049,-8.195 -12.049,-10.529 -11.046,-11.532 -9.982,-11.532 -9.677,-11.836 -9.677,-12.37 -9.238,-12.809 v1(-6.538,-12.809) ; v1@-6.679,-12.95 ccw(c-7.021,-13.292) -7.021,-12.809 ccw(c-7.021,-12.326) v1@-6.679,-12.667 ; v1@-2.413,-14.854 U2.8@-1.493,-14.854 ; v1@-2.297,-14.975 cw(c-2.005,-15.267) -2.005,-14.854 ccw(c-2.005,-15.267) v1@-2.297,-14.975 ; v1@-2.297,-14.692 ccw(c-1.906,-14.302) -1.906,-14.854 cw(c-1.906,-14.302) v1@-2.297,-14.692
  Bottom Layer w0.2: v1@-6.443,-12.903 v1(-6.538,-12.809) -6.538,-14.112 -5.867,-14.783 v1@-2.413,-14.783
  other v1: -2.438,-14.834
DOWN-A: Q6.2 Q6.5 R39.2 | length 39.6
  Top Layer w0.2: R39.2@-9.819,-10.714 -11.007,-10.714 -11.599,-10.121 -11.599,-8.009 -12.978,-6.63 -12.978,-3.799 -14,-2.777 -14,-0.071 -13.589,0.34 -3.397,0.34 v1(-2.948,-0.108) ; Q6.2@-5.619,-2.214 Q6.5@-3.619,-2.214 ; -5.076,-2.123 cw(c-4.937,-2.364) v1@-4.725,-2.184 ; -4.869,-2.003 cw(c-4.751,-2.207) v1(-4.572,-2.055) ; v1@-4.419,-2.184 cw(c-4.207,-2.364) -4.068,-2.123 ; -4.275,-2.003 ccw(c-4.393,-2.207) v1(-4.572,-2.055) ; -3.216,0.144 ccw(c-2.878,0.234) v1(-2.948,-0.108) ; -3.2,0.159 cw(c-3.291,-0.178) v1(-2.948,-0.108) ; v1(-4.572,-2.055) ccw(c-4.189,-1.672) -4.189,-2.214 cw(c-4.189,-1.672) v1(-4.572,-2.055) ; v1(-4.572,-2.055) cw(c-4.955,-1.672) -4.955,-2.214 ccw(c-4.955,-1.672) v1(-4.572,-2.055) ; -3.29,0.233 ccw(c-2.948,0.575) -2.948,0.092 cw(c-2.948,0.575) -3.29,0.233 ; -3.29,0.233 cw(c-3.631,-0.108) -3.148,-0.108 ccw(c-3.631,-0.108) -3.29,0.233 ; Q6.2@-5.438,-2.214 ccw(c-5.438,-1.189) -4.713,-1.914 cw(c-5.438,-1.189) Q6.2@-5.438,-2.214 ; v1@-4.431,-1.914 ccw(c-3.706,-1.189) -3.706,-2.214 cw(c-3.706,-1.189) v1@-4.431,-1.914
  Bottom Layer w0.2: v1(-4.572,-2.055) -4.572,-0.229 -4.125,0.218 -3.275,0.218 ; v1@-3.148,-0.102 ccw(c-3.581,-0.088) -3.275,0.218 ; v1@-2.955,0.092 cw(c-2.969,0.524) -3.275,0.218 ; v1(-2.948,-0.108) -3.275,0.218
DOWN-B: Q7.2 Q7.5 R44.2 | length 17.6
  Top Layer w0.2: Q7.2@-9.619,-2.214 Q7.5@-7.619,-2.214 -6.752,-2.214 -6.441,-2.525 -6.441,-3.909 -5.878,-4.472 -3.917,-4.472 -3.399,-4.99 -3.399,-7.544 v1(-3.38,-7.525) ; R44.2@0.711,-7.179 v1(0.711,-6.629) ; R44.2@0.711,-7.112 ccw(c0.228,-7.112) 0.57,-6.771 cw(c0.228,-7.112) R44.2@0.711,-7.112 ; R44.2@0.711,-7.112 cw(c1.194,-7.112) 0.853,-6.771 ccw(c1.194,-7.112) R44.2@0.711,-7.112
  Bottom Layer w0.2: v1(-3.38,-7.525) -3.38,-7.038 -2.972,-6.629 v1(0.711,-6.629)
G: LED2.3 LED3.3 LED4.1 pad.0@-2.464,-22.708 U2.11 | length 142.6
  Top Layer w0.2: v1(-16.48,-13.554) U2.11@-7.493,-13.554 ; v1(-12.75,19.75) -10.664,19.75 -10.002,19.088 LED2.3@-10.002,18.843 ; LED3.3@11.115,18.843 11.115,18.63 11.55,18.195 11.55,18.184 11.815,17.918 11.815,16.992 11,16.177 v1(11,16.406) ; 11.388,16.71 ccw(c11.551,16.103) v1(11,16.406) ; -12.267,19.75 ccw(c-12.267,19.267) -12.609,19.609 cw(c-12.267,19.267) -12.267,19.75 ; -12.267,19.75 cw(c-12.267,20.233) -12.609,19.891 ccw(c-12.267,20.233) -12.267,19.75 ; v1(11,16.406) ccw(c11,16.959) 11.391,16.568 cw(c11,16.959) v1(11,16.406) ; v1@11,16.606 ccw(c11,17.642) 11.733,16.91 cw(c11,17.642) v1@11,16.606
  Bottom Layer w0.2: v1(-16.48,-13.554) -16.75,-13.284 ; -13.01,19.317 cw(c-12.358,19.219) v1(-12.75,19.75) ; v1@-12.859,19.582 cw(c-12.935,19.464) -12.796,19.443 cw(c-12.657,19.422) v1@-12.695,19.558 ; pad.0@-2.57,-23.664 -2.54,-23.634 LED4.1@-2.54,-22.25 ; 11.283,16.13 cw(c11.387,16.52) v1(11,16.406) 11.052,16.406 12.97,14.488 16.164,14.488 16.554,14.097 16.554,-17.267 16.398,-17.423 cw(c0.004,-0.032) -15.876,-17.893 -15.876,-16.965 -16.75,-16.091 -16.75,-13.284 ; -16.75,-13.284 -16.75,17.309 -15.093,18.965 -13.215,18.965 ; -13.215,18.965 ccw(c-13.873,19.623) -12.949,19.727 cw(c-13.873,19.623) -13.215,18.965 ; -13.215,18.965 -12.75,19.43 ; -12.75,19.43 ccw(c-12.905,19.43) -12.837,19.57 cw(c-12.905,19.43) -12.75,19.43 ; -12.75,19.43 cw(c-12.595,19.43) -12.663,19.57 ccw(c-12.595,19.43) -12.75,19.43 ; -12.75,19.43 v1(-12.75,19.75) ; v1(-12.75,19.75) cw(c-13.346,19.683) -12.922,19.259 ccw(c-13.346,19.683) v1(-12.75,19.75) ; v1@11,16.206 cw(c11,15.599) 11.43,16.028 ccw(c11,15.599) v1@11,16.206 ; v1@11.2,16.406 ccw(c11.558,16.406) 11.305,16.153 cw(c11.558,16.406) v1@11.2,16.406